# Altium PCB pechatka.PcbDoc
Units mil, origin at the board's own origin, x right, y up, seen from the top; angles counter-clockwise.
Board outline 1140 x 1603 mil, 2 copper layers (Top Layer, Bottom Layer); 26 components, 11 nets, 54 pads, 10 vias.
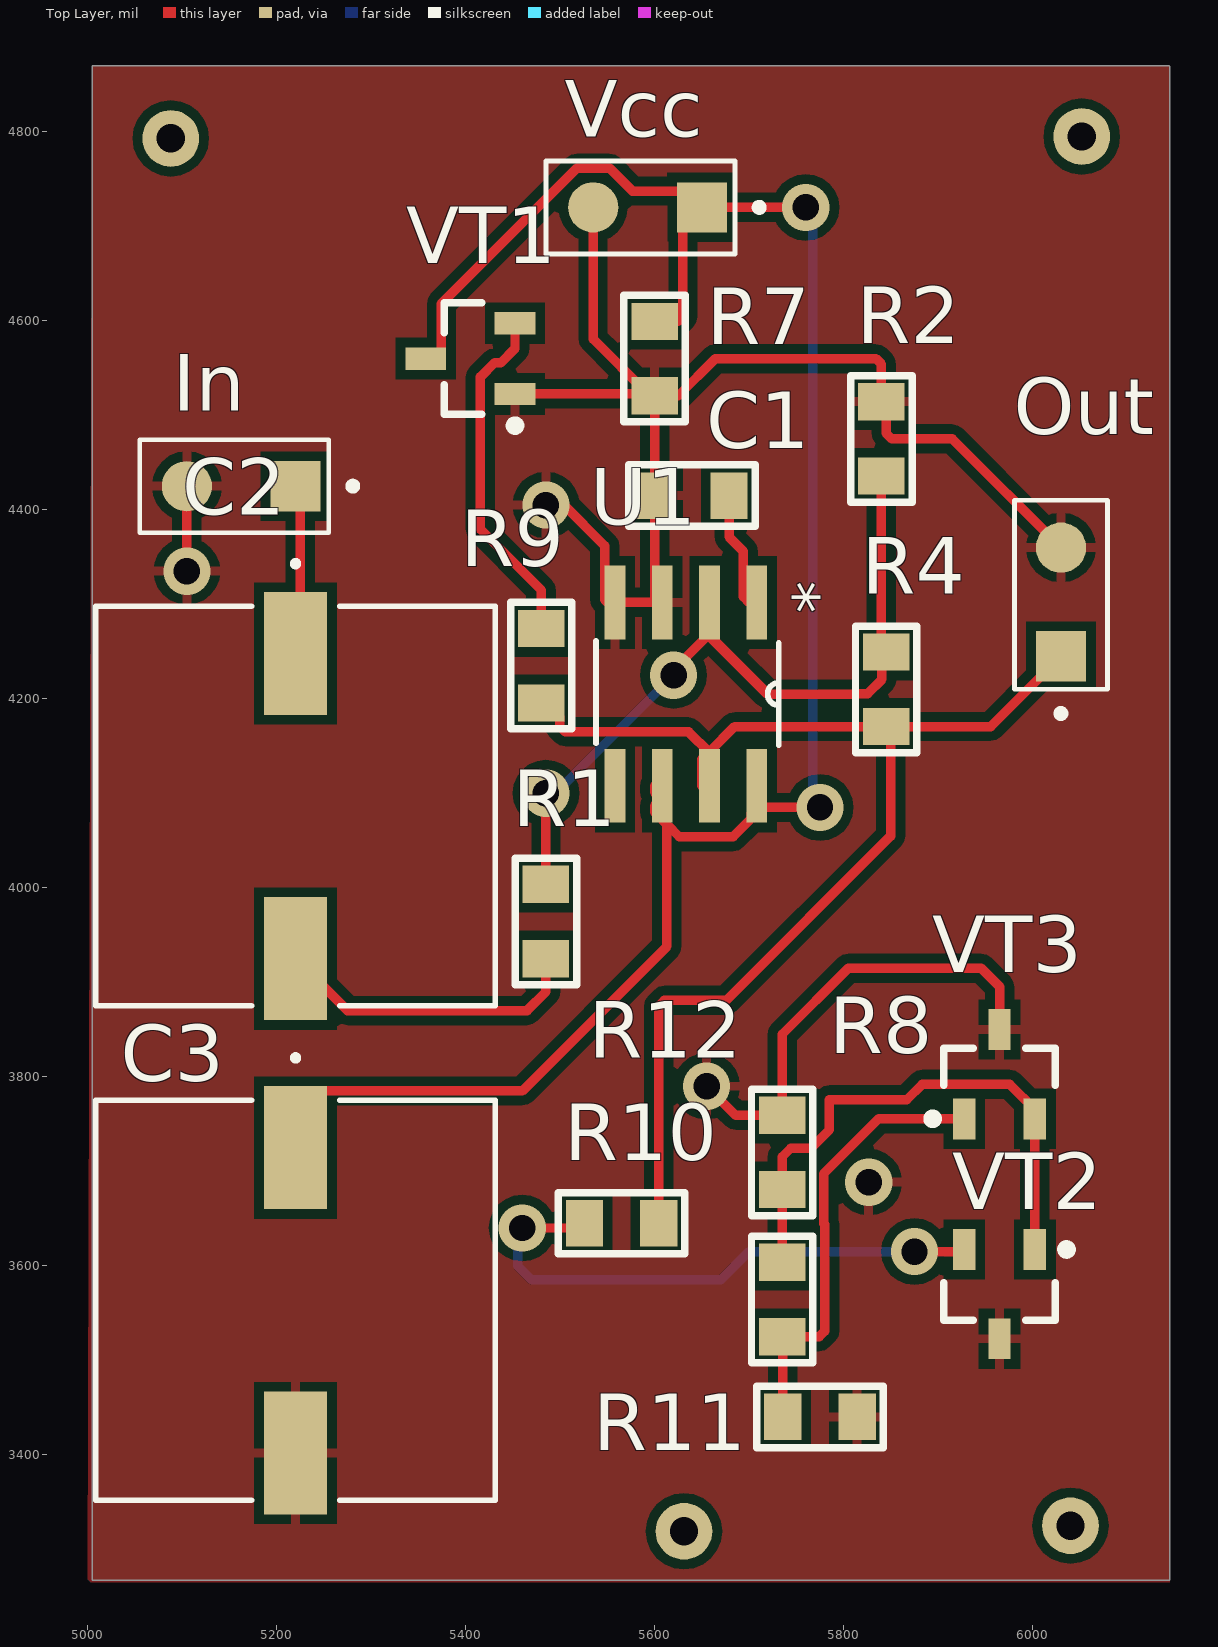
[diagram p0: Top Layer view]
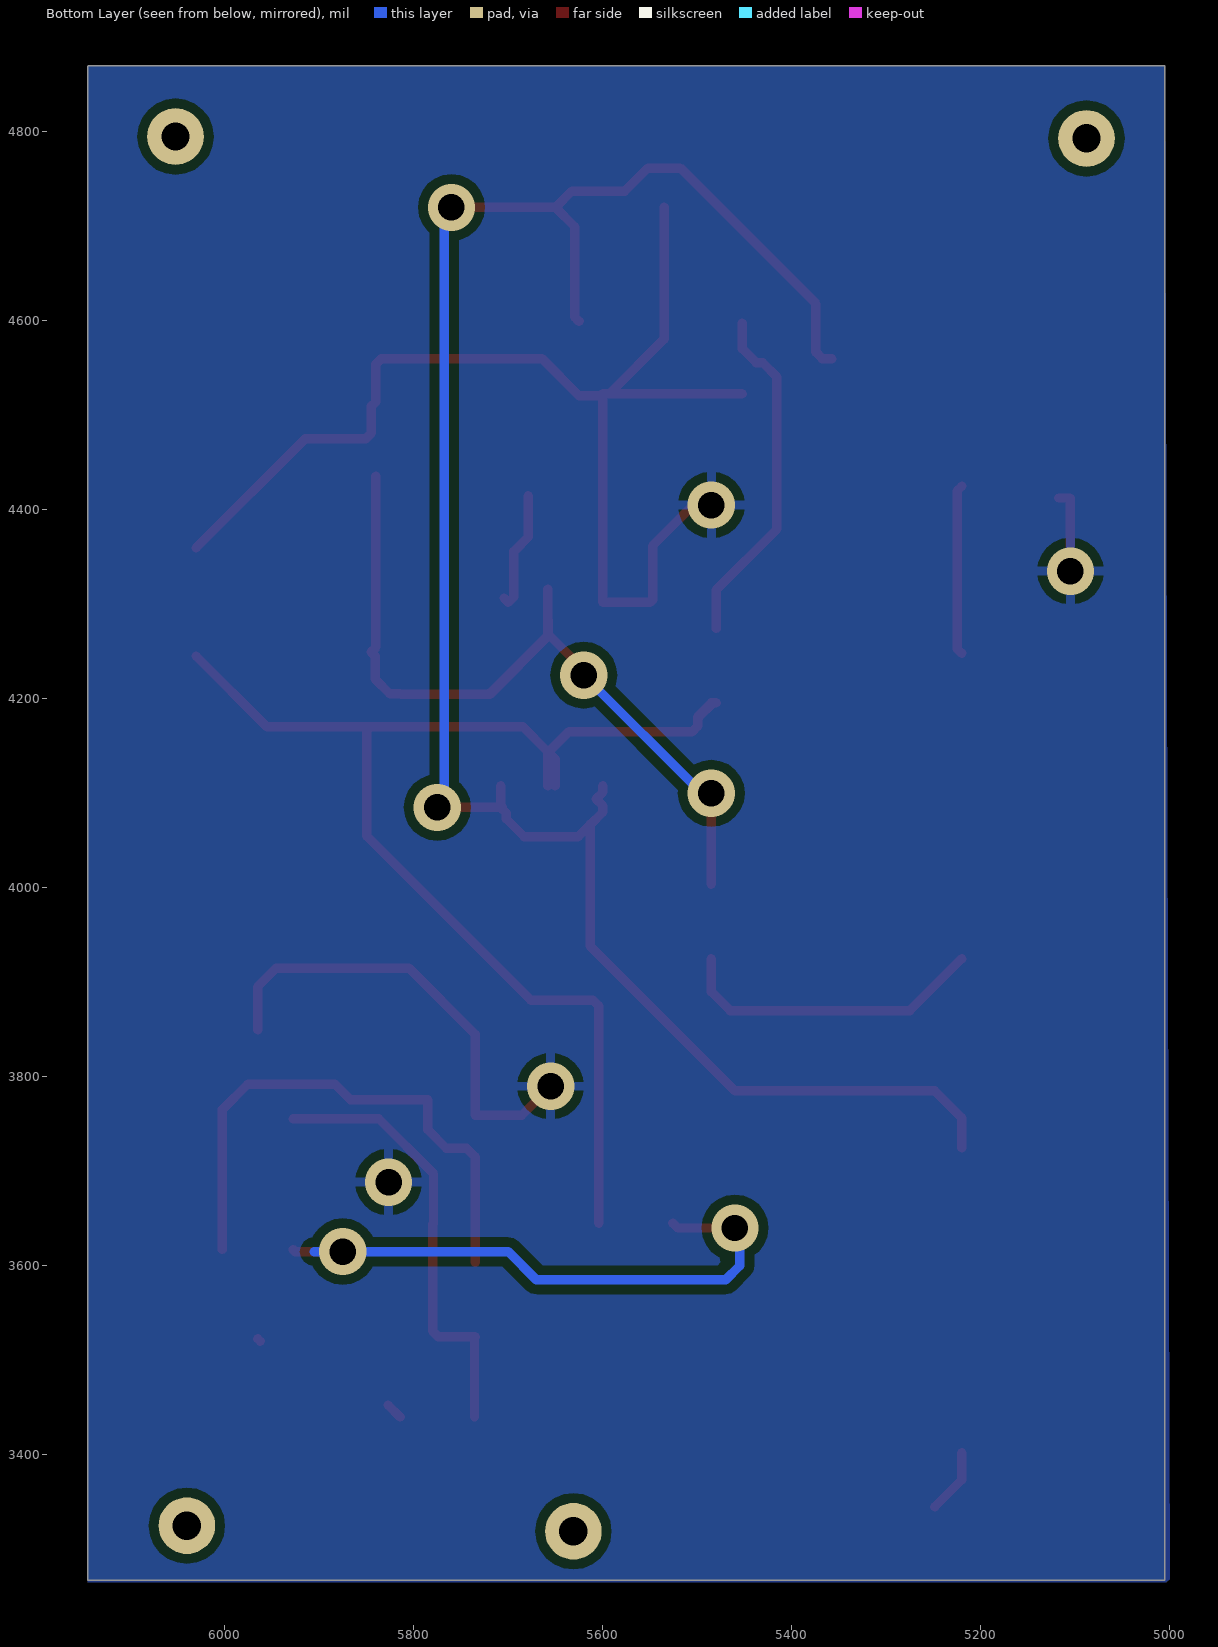
[diagram p1: Bottom Layer view, seen from below]

## Layer stack, top to bottom
Top Solder: solder mask 0.4, Solder Resist, Dk 3.5
Top Layer: signal copper 1.4
Dielectric 1: dielectric 12.6, FR-4, Dk 4.8
Bottom Layer: signal copper 1.4
Bottom Solder: solder mask 0.4, Solder Resist, Dk 3.5

## Board outline
5005,3267 6145,3267 6145,4869 6144,4870 5005,4870

## Design rules (kind name [scope] priority, off if disabled: settings)
Clearance [All] p1: gap=10 ignorepadtopadclearanceinfootprint=FALSE except(0: Arc-Hole Track-Hole SMDPad-Hole THPad-Hole Via-Hole Fill-Hole Poly-Hole Region-Hole Text-Hole)
PolygonConnect [All] p1: connectstyle=Relief reliefconductorwidth=10 reliefentries=4 polygonreliefangle="90 Angle" airgapwidth=10
RoutingVias [All] p1: holewidth=28 width=50 viastyle="Through Hole" minholewidth=28 minwidth=50 maxholewidth=28 maxwidth=50
SolderMaskExpansion [All] p1: expansion=4 istentingtop=FALSE
Width [All] p1: maxlimit=10 minlimit=10 preferedwidth=10
30 further rules are at their usual default settings.

## Classes and differential pairs
component class pricipialka: C1 C2 C3 In Out R1 R2 R4 R7 R8 R9 R10 R11 R12 U1 Vcc VT1 VT2 VT3

## Components (designator, comment, footprint, x,y, rotation, side; value= is the part's Value field where it differs from the comment)
C1 "Ceramic capacitor, 0.1μF, X7R, ±10%, 16V, 0805, -55...+125°C" "CAP: 0805" 5639.37,4415 r180 top value=0.1μF
C2 "Part Number: 35TZV330M10X10.5" CAP_J-V_10X10P00 5220,4086.5 r270 top value=Value
C3 "Part Number: 35TZV330M10X10.5" CAP_J-V_10X10P00 5220,3563.5 r270 top value=Value
In "2х1" "2х1 SMD" 5205,4425 r180 top
Out "2х1" "2х1 SMD" 6030,4260 r90 top
R1 "Resistor film, 10K, ±5%, 0805, 0.125W, -55...+125°C" "RES: 0805" 5485,3964.37 r90 top value=10K
R2 "Resistor film, 15K, ±5%, 0805, 0.125W, -55...+125°C" "RES: 0805" 5840,4475 r270 top value=15K
R4 "Resistor film, 130K, ±5%, 0805, 0.125W, -55...+125°C" "RES: 0805" 5845,4210 r270 top value=130K
R7 "Resistor film, 10K, ±5%, 0805, 0.125W, -55...+125°C" "RES: 0805" 5600,4560 r270 top value=10K
R8 "Resistor film, 15K, ±5%, 0805, 0.125W, -55...+125°C" "RES: 0805" 5735,3720 r270 top value=15K
R9 "Resistor film, 15K, ±5%, 0805, 0.125W, -55...+125°C" "RES: 0805" 5480,4235 r90 top value=15K
R10 "Resistor film, 15K, ±5%, 0805, 0.125W, -55...+125°C" "RES: 0805" 5565,3645 r0 top value=15K
R11 "Resistor film, 15K, ±5%, 0805, 0.125W, -55...+125°C" "RES: 0805" 5775,3440 r0 top value=15K
R12 "Resistor film, 15K, ±5%, 0805, 0.125W, -55...+125°C" "RES: 0805" 5735,3564.37 r270 top value=15K
U1 "LM311DR" D8 5633,4205 r270 top
Vcc "2х1" "2х1 SMD" 5635,4720 r180 top
VT1 "NPN transistor, 45V, 100mA, 100MHz, 300mW, 0.6V, 420, SOT-23, -55...+125°C" SOT23 5405,4560 r180 top
VT2 "PNP transistor, 45V, 100mA, 100MHz, 300mW, 0.65V, 220, SOT-23, -55...+125°C" SOT23 5965,3570 r270 top
VT3 "NPN transistor, 45V, 100mA, 100MHz, 300mW, 0.6V, 420, SOT-23, -55...+125°C" SOT23 5965,3802.76 r90 top
ZBOAS134091851 "Comment" "BOASVIEWdrill:Таблица отверстий:0:0:0:0" 1340,91851 r0 top
ZBOAS277093314 "Comment" "BOASVIEWlayer:Top Layer:2,5:1:1:1" 2770,93314 r0 top (schematic designator fewf)
ZBOAS1856698006 "Comment" "BOASVIEWlayer:Bottom Layer:2,5:-1:32:2" 18566,98006 r0 top (schematic designator fewf)
ZBOAS1947293023 "Comment" "BOASVIEWside:Вид платы слева:2,5:0:0:0" 19472,93023 r0 top
ZBOAS2192091068 "Comment" "BOASVIEWside:Вид платы сверху:2,5:0:0:0" 21920,91068 r0 top
ZBOAS2377994059 "Слой маркировки" "BOASVIEWlayer:Top Overlay:2,5:1:33:2" 23779,94059 r0 top (schematic designator fewf)
ZBOAS3586894775 "Comment" "BOASVIEWassembly:Вид спереди для сборочного:2:1:0:101" 35868,94775 r0 top

## Footprints (in the part's own frame and the unit in brackets; to place one, negate y for a bottom-side part, rotate by r counter-clockwise, add the part's x,y. Pads: shape width x height; smd on the part's side, far side on the other; paste and mask are expansions set on the pad)
"2х1 SMD" [mm]
  rect 1.35x1.35 smd: 1(-0.381,0)
  round 1.35 smd: 2(2.54,0)
  silkscreen extent -2.02,-1.25 3.81,1.25, body extent -5.33,-3.56 7.92,2.85, height 8.76
"BOASVIEWassembly:Вид спереди для сборочного:2:1:0:101" [mil]
"BOASVIEWdrill:Таблица отверстий:0:0:0:0" [mil]
"BOASVIEWlayer:Bottom Layer:2,5:-1:32:2" [mil]
"BOASVIEWlayer:Top Layer:2,5:1:1:1" [mil]
"BOASVIEWlayer:Top Overlay:2,5:1:33:2" [mil]
"BOASVIEWside:Вид платы сверху:2,5:0:0:0" [mil]
"BOASVIEWside:Вид платы слева:2,5:0:0:0" [mil]
"CAP: 0805" [mm]
  rect 1x1.25 smd: 1(-1,0) 2(1,0)
  silkscreen extent -1.7,-0.82 1.7,0.82, body extent -1,-0.62 1,0.63, height 0.78
CAP_J-V_10X10P00 [mil]
  rect 130x67 smd: 1(-161.5,0) 2(161.5,0)
  silkscreen extent -259,-212 212,212, body extent -222,-203 222,203, height 425
D8 [mil]
  rect 78x22 smd: 1(-97,75) 2(-97,25) 3(-97,-25) 4(-97,-75) 5(97,-75) 6(97,-25) 7(97,25) 8(97,75)
  silkscreen extent -56,-95 54,99, body extent -118,-96 118,96, height 69
"RES: 0805" [mm]
  rect 1x1.25 smd: 1(-1,0) 2(1,0)
  silkscreen extent -1.7,-0.82 1.7,0.82, body extent -1,-0.6 1,0.6, height 0.44
SOT23 [mm]
  rect 1.1x0.6 smd: 1(-1.2,0.95) 2(-1.2,-0.95) 3(1.2,0)
  round 0.5 on Mech1: ""(-0.9,1.1)
  silkscreen extent -1.33,-1.5 0.7,1.92, body extent -1.32,-1.52 1.32,1.52, height 1.12

## Part data
C1: library part Ceramic_0805, Manufacturer=Yageo, Package=0805, PartNumber=CC0805KRX7R7BB104, Temperature=-55...+125°C, Tolerance=±10%, TypeCapacitor="Ceramic capacitor", TypeDielectric=X7R, Voltage=16V, HelpURL=https://www.digikey.com/product-detail/en/yageo/CC0805KRX7R7BB104/311-1142-1-ND/303052, ValueManufacturerPartNumber="Ceramic capacitor, 0.1μF, X7R, ±10%, 16V, 0805, -55...+125°C"
C2 C3: library part 35TZV330M10X10.5, "No Description Available", Built_By=EMA_Cory, Copyright="Copyright (C) 2018 Accelerated Designs. All rights reserved", Manufacturer_Part_Number=35TZV330M10X10.5, RefDes=RefDes, Type=DEV, Vendor="Rubycon Netherlands"
In Out Vcc: "Board-To-Board Connector, Straight, AMPMODU Mod II Series, Through Hole, Header, 2, 2.54 mm", Package=None, Availability=Unavailable, Centerline_Pitch="2.54 mm[.1 in]", EU_RoHS_Compliance=Compliant, MF="TE Connectivity", MP=826926-2, Number_of_Positions=2, Price=None, Product_Type=Connector, SnapEDA_Link=https://www.snapeda.com/parts/826926-2/TE%20Connectivity%20AMP%20Connectors/view-part/554683/?ref=snap, TE_purchase_URL=https://www.te.com/usa-en/product-826926-2.html?te_bu=Cor&te_type=disp&te_campaign=seda_glo_cor-seda-global-disp-prtnr-fy19-seda-model-bom-cta_sma-317_1&elqCampaignId=32493
R1 R2 R4 R7 R8 R9 R10 R11 R12: library part Resistor_0805, Manufacturer=Yageo, Package=0805, PartNumber=RC0805JR-07100RL, Power=0.125W, Temperature=-55...+125°C, Tolerance=±5%, TypeResistor="Resistor film", HelpURL=https://www.digikey.com/product-detail/en/yageo/RC0805JR-07100RL/311-100ARCT-ND/731185
  R1 R7: ValueManufacturerPartNumber="Resistor film, 10K, ±5%, 0805, 0.125W, -55...+125°C"
  R2 R8 R9 R10 R11 R12: ValueManufacturerPartNumber="Resistor film, 15K, ±5%, 0805, 0.125W, -55...+125°C"
  R4: ValueManufacturerPartNumber="Resistor film, 130K, ±5%, 0805, 0.125W, -55...+125°C"
U1: "Differential Comparator With Strobes", Manufacturer="Texas Instruments", PACKAGE_DESIGNATOR=D, Copyright="Copyright (C) 2018 Accelerated Designs. All rights reserved", Datasheet_URL=http://www.ti.com/lit/gpn/LM311, FAMILY_NAME=COMPARATOR, GENERIC_PART_NUMBER=LM311, INDUSTRY_STD_PKG_TYPE=SOIC, PIN_COUNT=8, RefDes=RefDes, Type=DEV
VT1 VT3: library part BJT_NPN_132, CurrentCE=100mA, CurrentGain=420, Frequency=100MHz, Manufacturer="ON Semiconductor", MaxPower=300mW, Package=SOT-23, PartNumber=BC847CLT1G, Temperature=-55...+125°C, VoltageCE=45V, VoltageSaturation=0.6V, HelpURL=https://www.digikey.com/product-detail/en/on-semiconductor/BC847CLT1G/BC847CLT1GOSCT-ND/917836, TypeTransistor="NPN transistor", ValueManufacturerPartNumber="NPN transistor, 45V, 100mA, 100MHz, 300mW, 0.6V, 420, SOT-23, -55...+125°C"
VT2: library part BJT_PNP_123, CurrentCE=100mA, CurrentGain=220, Frequency=100MHz, Manufacturer="ON Semiconductor", MaxPower=300mW, Package=SOT-23, PartNumber=BC857BLT3G, Temperature=-55...+125°C, VoltageCE=45V, VoltageSaturation=0.65V, HelpURL=https://www.digikey.com/product-detail/en/on-semiconductor/BC857BLT3G/BC857BLT3GOSCT-ND/2704963, TypeTransistor="PNP transistor", ValueManufacturerPartNumber="PNP transistor, 45V, 100mA, 100MHz, 300mW, 0.65V, 220, SOT-23, -55...+125°C"

## Free pads (board coordinates)
  round 60 hole 30: 5(6052,4795) 6(5088,4793) 7(6040,3325) 8(5631,3319)

## Via types
v1: diameter 50, hole 28, Top Layer to Bottom Layer, 10 vias

## Nets (pads, with @x,y where several pads share a name; then routed paths per layer and width w, separated by ;. In a path a pad name is that pad's centre, name@x,y a point inside that pad or via, vN(x,y) a via of type N, cw(c..) or ccw(c..) an arc to the next point about the centre after c; other vN are vias at no path point)
GND: C1.2 C3.2 In.2 Out.2 R2.1 R7.2 R8.1 R11.2 U1.3 U1.4 Vcc.2 VT1.1 VT2.3 VT3.3 | length 2026.9
  Top Layer w10: v1(5105,4335) 5105,4411.97 5105.53,4412.5 In.2@5117.5,4412.5 ; C3.2 5220,3373.5 C3.2@5248.5,3345 ; VT1.1 R7.2@5593.11,4522.6 ; v1(5485,4405) 5504.07,4405 5547.1,4361.97 5547.1,4304.9 5550,4302 5600,4302 C1.2 R7.2 5625,4520.63 5664.37,4560 5834.14,4560 5840,4554.14 R2.1 5845,4509.37 5845,4480.86 5850.86,4475 5915,4475 Out.2 ; Vcc.2 5535,4580.71 R7.2@5593.11,4522.6 ; R7.2@5600,4522.6 R7.2@5593.11,4522.6 ; v1@5662.65,3797.65 5658.83,3793.83 5658.83,3786.17 5685.63,3759.37 R8.1 5735,3845 5805,3915 5945.51,3915 5965,3895.51 VT3.3 ; R11.2 R11.2@5826.87,3452.5 ; v1(5826.52,3688.48) v1@5826.87,3688.13 ; VT2.3@5962.44,3520.19 VT2.3
  other v1: 5655,3790
NetC1_1: C1.1 U1.1 | length 128
  Top Layer w10: C1.1 5678.74,4371.26 5694,4356 5694,4308 5700,4302 U1.1@5704.37,4306.37
NetC2_1: C2.1 In.1 | length 181.1
  Top Layer w10: C2.1 5225,4253 5225,4420 In.1
NetC2_2: C2.2 R1.1 | length 331.1
  Top Layer w10: C2.2 5275,3870 5465,3870 5485,3890 R1.1
NetC3_1: C3.1 R7.1 U1.6 U1.8 Vcc.1 VT1.3 | length 2194.9
  Top Layer w10: C3.1 5220,3756.5 5248.5,3785 5460,3785 5613,3938 5613,4067 ; VT1.3 5367.6,4560 5374.41,4566.81 5374.41,4618.21 5517.78,4761.57 5552.22,4761.57 5576.57,4737.22 5632.78,4737.22 Vcc.1 ; U1.6@5600,4108 5600,4101 5607,4094 5600,4087 5600,4080 5613,4067 ; 5625,4599.37 5629.61,4603.98 5629.61,4699.61 Vcc.1 ; U1.8@5706,4085 U1.8@5708,4085 ; U1.8 U1.8@5708,4085 ; v1(5760,4720) Vcc.1 ; v1(5775,4085) U1.8@5708,4085 ; 5613,4067 5626,4054 5683,4054 5702,4073 5702,4079 U1.8@5708,4085
  Bottom Layer w10: v1(5760,4720) 5767.5,4712.5 5767.5,4092.5 v1(5775,4085)
NetOut_1: Out.1 R4.2 R9.1 R10.2 U1.7 | length 1385.4
  Top Layer w10: R9.1@5497.73,4180.94 5483.05,4195.63 R9.1 5484.92,4195.63 5499.61,4180.94 5499.61,4170.86 5505.46,4165 5636,4165 5658,4143 U1.7 ; R10.2 5604.37,3875.15 5610.23,3881.01 5676.01,3881.01 5849.69,4054.69 5849.69,4165.94 R4.2 ; U1.7@5650,4108 5650,4136 5657.5,4143.5 5684.63,4170.63 R4.2 ; Out.1 5955.63,4170.63 5849.69,4170.63 R4.2
NetR1_2: R1.2 R2.2 R4.1 U1.2 | length 961.2
  Top Layer w10: R1.2 v1(5485,4100) ; v1(5620,4225) 5620,4230.78 5657.05,4267.83 5657.51,4267.4 5657.86,4302 5658,4316.11 U1.2 5658,4267 5718.81,4206.19 5720,4205 ; U1.2@5657.5,4266.5 5718.31,4205.69 ccw(c5720,4207.41) 5720,4205 ; R2.2 5840,4254.37 R4.1 5840.54,4244.91 5840.54,4220.54 5825.31,4205.31 5814.18,4205.31 5813.87,4205 5720,4205
  Bottom Layer w10: v1(5485,4100) 5495,4100 v1(5620,4225)
NetR8_2: R8.2 R12.1 VT2.1 VT3.2 | length 588.6
  Top Layer w10: R12.1 R8.2 5735,3715.32 5744.08,3724.39 5765.53,3724.39 5785,3743.87 5785,3775.63 5866.85,3775.63 5883.38,3792.17 5975.59,3792.17 6002.4,3765.35 VT3.2 VT2.1
NetR9_2: R9.2 VT1.2 | length 368.8
  Top Layer w10: VT1.2 5452.24,4570.59 5437.26,4555.61 5430.57,4555.61 5415.59,4540.62 5415.59,4379.41 5480,4315 R9.2
NetR10_1: R10.1 VT2.2 | length 631.9
  Top Layer w10: v1(5460,3640) 5520.63,3640 R10.1 ; v1(5875,3615) 5925.35,3615 VT2.2
  Bottom Layer w10: v1(5460,3640) 5455,3635 5455,3600 5470,3585 5670,3585 5700,3615 5905,3615
NetR11_1: R11.1 R12.2 VT3.1 | length 472.4
  Top Layer w10: R11.1 5735.63,3524.37 R12.2 5774.14,3525 5780,3530.86 5780,3643.75 5779.02,3644.73 5779.02,3697.56 5836.98,3755.51 VT3.1
pads on no net: U1.5 VT1. VT2. VT3.

## Polygon pours and split planes (outlines as drawn)
GND on Top Layer "GND_L01_P002" (solid, pour order 2): 5004.95,4870 6145,4870 6145,3265 4999.98,3265
no net on Top Layer "NONET_L01_P000" (solid, pour order 0): 4985,4930
GND on Bottom Layer "GND_L02_P001" (solid, pour order 1): 5004.95,4870 6145,4870 6145,3265 4999.98,3265

## Silkscreen, mask and mechanical layers (free items; w line width, h text height)
Board:
  text "BOASFORMAT|А3|1|0|883070867|165354330|1000000000|2,5:1|" at 0,100000 h0
  text "BOASFORMAT|А3|2|165354330|883070867|330708660|1000000000|2,5:1|" at 16535.43,100000 h0
  text "BOASFORMAT|А4|101|330708660|883070867|413385825|1000000000|2,5:1|" at 33070.87,100000 h0
  text "DimD|45635001|982330001|-8864999|-6699999|375000|2,5|4 отв.|||js12|False|False|False|False" at 5450,98903 h0
  text "DimPos|365380000|978080000|7820000|-10320000|4|1178539" at 35756,98840 h0
  text "DimPos|371780000|977020000|-15740000|-10040000|1|908151" at 38752,98706 h0
  text "DimPos|371710000|977270000|4150000|-8710000|3|1537097" at 36756,98598 h0
  text "DimPos|377140000|978040000|-4200000|-7120000|2|1772217" at 38134,98516 h0
  text "DimV|-10000|-40120000|24380000|984190000|-11750000|-37180000|2,5||||js12|False|False|False|False" at 2438,98419 h0
  text "DimPos|378790000|971690000|-10890000|-9730000|10|2286542" at 38968,98142 h0
  text "DimPos|379870000|974080000|-10760000|-6400000|3|1537097" at 39063,98048 h0
  text "DimPos|379180000|969700000|-8760000|-7880000|1|908151" at 38794,97758 h0
  text "DimPos|379430000|969820000|-13870000|-5150000|2|1772217" at 39330,97497 h0
  text "DimPos|367850000|969780000|10990000|-5170000|11|1904472" at 35686,97495 h0
  text "DimH|-28490000|0|56220000|973180000|-15960000|8070000|2,5||||js12|False|False|False|False" at 5622,97318 h0
  text "DimMark|54170000|966090000|-13410000|-3850000|1||||0" at 6758,96994 h0
  text "DimV|40000|-490000|276270000|967190000|5620000|-530000|2,5||||js12|False|False|False|False" at 27627,96719 h0
  text "DimPos|360960000|962170000|7420000|-4660000|4|1178539" at 35354,96683 h0
  text "DimPos|360850000|961640000|0|0|5|1742827" at 36085,96164 h0
  text "DimPos|379750000|951270000|-7520000|-6500000|5|1742827" at 38727,95777 h0
  text "DimPos|361730000|950910000|9270000|-6040000|6|1454805" at 35246,95695 h0
  text "SET2|Superlayer=MechanicalLayer7|Wsuperlayer=MechanicalLayer8|Layergrid=MechanicalLayer9|Werase=MechanicalLayer11|Layermark=MechanicalLayer12|Layerstamp=MechanicalLayer13|Thinline=0,18|Basicline=0,6|Gridline=0,18|Boardline=0,6|Contourpolygonline=0,6|PcbGridStep=1,25|PcbGridCleareanceAtView=0|PcbGridNumberEach=l4|PcbGridLineEach=l2|PcbGridCountSecondaryStrip=1|PcbGridEnabledStrip=True|PcbSignalGridEnabled=True|PcbSignalShowBukva=True|RealSignalLayerNames=False|PcbGridEnabledBothSide=False|RealLayerNames=False|SilkShowPad=True|SilkViewName=Слой маркировки|SilkShowHole=True|SilkShowAxis=True|SilkShowBukva=True|SilkShowGrid=False|SolderShowGrid=False|SolderViewName=Слой маски|SolderShowAxis=False|SolderShowBukva=False|MainViewShowGrid=False|MainViewUseShapesDrill=False|ShowBukvaOnSboky=True|Density=2,2|TableName=Таблица 1|RazrezWidth=100|Sher=Rz 160|Asstoplayer=MechanicalLayer1|Asstoplayer2=None|Assbottomlayer=MechanicalLayer2|Assbottomlayer2=None|AssMinDiameterHoles=2|AssDim=True|AssMech=False|AssSilk=False|AssComponentSilk=False|AssFreeSilk=False|AssSmdPads=False|AssGridEnable=False|Mirror=Horisontal|PcbGridFontSize=5|PcbGridCenterZero=False|TTStampDistance=12|MainFontSize=5|PolyStep=4|PcbDrillDrawingGridEnabled=False|PcbDrillDrawingViewName=Слой сверловки|PcbDrillDrawingShowBukva=False|PcbDrillDrawingShowAxis=False|PcbSignalLayersUseDrill=False|PcbSignalLayersUseShapesDrill=False|PcbSignalLayersShowAxis=False" at 0,1 h0
  text "2TT0007#  8 Клеймить." at 0,0 h0
  text "2TT0006#  7 Маркировать обозначение и заводской номер печатного узла черной краской МКЭ ОСТ 4ГО.054.2050М2 шрифтом 3,5 или 5 тип А ГОСТ 2.304-81, вместе, удобном для чтения." at 0,0 h0
  text "2TT0005#  6 Покрытие лак УР-231 ТУ6-21-14-90(3). Допускается покрытие лаком ЭП-730 ГОСТ 20824-81(3)." at 0,0 h0
  text "2TT0004#  5 Элементы поверхностного монтажа паять припойной пастой ПОС-61 ЛОК ТУ 400 К''Р''-1805-22-91, флюс ФПС-3 ТУ400 СП \"ЭВ\"-2178-137-98." at 0,0 h0
  text "2TT0003#  4 Меры защиты от статического электричества по ОСТ 92-1615-74. Степень жесткости II по ОСТ11.073.062-2001." at 0,0 h0
  text "2TT0002#  3** Размеры обеспеч. инстр." at 0,0 h0
  text "2TT0001#  2* Размеры для справок." at 0,0 h0
  text "2TT0000#  1 Установку элементов производить по чертежу." at 0,0 h0
  text "2STAMP|Разработал|Гончаренко В.Ю." at 0,0 h0
  text "2STAMP|Проверил|Смолин В.С." at 0,0 h0
  text "2STAMP|Техконтроль|Рассказа Д.С." at 0,0 h0
  text "2STAMP|Var|Нач. отд." at 0,0 h0
  text "2STAMP|Tech|Т.контр." at 0,0 h0
  text "2STAMP|Normo|Н.контр." at 0,0 h0
  text "2STAMP|Check|Пров." at 0,0 h0
  text "2STAMP|Design|Разраб." at 0,0 h0
  text "2STAMP|Utv|Утв." at 0,0 h0
  text "2STAMP|Обозначение|CФ МЭИ ПЭ2-18 3 11.03.04 СБ" at 0,0 h0
  text "2STAMP|Организация|Филиал НИУ \"МЭИ\" в г.Смоленск ПЭ2-18" at 0,0 h0
  text "2STAMP|ТипДокумента|Сборочный чертёж" at 0,0 h0
  text "2STAMP|Наименование2|Усилитель звука на дискретных элементах" at 0,0 h0
  text "STAMP|Обозначение|CФ МЭИ ПЭ2-18 3 11.03.04" at 0,0 h0
  text "STAMP|Организация|Филиал НИУ \"МЭИ\" в г.Смоленск ПЭ2-18" at 0,0 h0
  text "STAMP|Наименование2|Плата печатная" at 0,0 h0
  text "STAMP|Материал1|FR-4" at 0,0 h0
  text "STAMP|Разработал|Гончаренко В.Ю." at 0,0 h0
  text "STAMP|Проверил|Смолин В.С." at 0,0 h0
  text "STAMP|Техконтроль|Рассказа Д.С." at 0,0 h0
  text "STAMP|Var|Нач. отд." at 0,0 h0
  text "STAMP|Normo|Н.контр." at 0,0 h0
  text "STAMP|Utv|Утв." at 0,0 h0
  text "STAMP|Tech|Т.контр." at 0,0 h0
  text "STAMP|Check|Пров." at 0,0 h0
  text "STAMP|Design|Разраб." at 0,0 h0
  text "TT0016#  17 Маркировать месяц и год изготовления черной краской МКЭ ОСТ4 ГО.054.205 ОМ2 по инструкции И-75-89 шрифтом 3,5 или 5 тип А ГОСТ 2.304-81." at 0,0 h0
  text "TT0015#  16 Покрытие контактных площадок и металлизированных отверстий Хим. Мм Гор. ПОС-63, ГОСТ 21930-76." at 0,0 h0
  text "TT0014#  15 Маркировать защитной маской PMR-6000 W30/CA-40 G30, цвет белый, фирма «TAIYO INK». Попадание маркировочной краски на паяемые поверхности не допускается. Допускаются разрывы в маркировочных знаках, не искажающие восприятие информации." at 0,0 h0
  text "TT0013#  14 Покрытие печатной платы защитной паяльной маской TAIYO PSR-4000 H855/CA-40 H855 фирма «TAIYO INK»  с двух сторон, кроме контактных площадок. Допускается отсутствие покрытия вокруг контактных площадок, включая проводники и полигоны, на размере не более 0,5 мм от края контактной площадки. Допускается отсутствие покрытия по контуру платы и вокруг неметаллизированных отверстий на размере не более 1,1 мм." at 0,0 h0
  text "TT0012#  13 Покрытие проводящего рисунка платы Хим. Мм." at 0,0 h0
  text "TT0011#  12 Допускается полное или частичное заполнение припоем переходных отверстий, их диаметры контролю не подлежат." at 0,0 h0
  text "TT0010#  11 Предельные отклонения расстояний между центрами отверстий ±0,2 мм, кроме оговоренных особо." at 0,0 h0
  text "TT0009#  10 Форма контактной площадки произвольная. Допускается занижение контактных площадок до 0,05 мм от края отверстия." at 0,0 h0
  text "TT0008#  9 Расстояние между печатными проводниками и контактными площадками не менее 0,2 мм." at 0,0 h0
  text "TT0007#  8 Ширина печатных проводников не менее (0,25±0,05) мм." at 0,0 h0
  text "TT0006#  7 Места, обведенные штрихпунктирной линией, печатными проводниками и контактными площадками не занимать." at 0,0 h0
  text "TT0005#  6 Конфигурацию печатных проводников выдерживать по координатной сетке с отклонениями от чертежа ±1,5 мм." at 0,0 h0
  text "TT0004#  5 Шаг координатной сетки 1,25 мм. Линии сетки нанесены через одну." at 0,0 h0
  text "TT0003#  4 Печатная плата должна соответствовать ГОСТ Р 53429-2009, группе жесткости 3 при верхнем значении температуры окружающей среды (85±2) °С." at 0,0 h0
  text "TT0002#  3 Класс точности 3 по ГОСТ Р 53429-2009." at 0,0 h0
  text "TT0001#  2 ** Размер обеспеч. инстр." at 0,0 h0
  text "TT0000#  1 *  Размер для справок." at 0,0 h0
  text "BOASVIADRILLTABLE:none,280000,10," at 0,0 h0
  text "2BOASDRILLTABLE:none,300000,Да,4,True," at 0,0 h0
Mechanical 8:
  region: 25327.64,91062.36 25353.11,90995.73 25372.44,90849.49 25327.78,90849.47 25327.74,90886.15 25349.92,90869.15 25324.13,91062.35
  region: 25327.64,91118.64 25353.11,91185.27 25372.44,91331.51 25327.78,91331.53 25327.74,91294.85 25349.92,91311.85 25324.13,91118.65
  region: 25320.36,91062.36 25294.89,90995.73 25275.56,90849.49 25320.22,90849.47 25320.26,90886.15 25298.08,90869.15 25323.87,91062.35
  region: 25320.36,91118.64 25294.89,91185.27 25275.56,91331.51 25320.22,91331.53 25320.26,91294.85 25298.08,91311.85 25323.87,91118.65
  region: 5618.36,98128.64 5551.73,98154.11 5405.49,98173.44 5405.47,98128.78 5442.15,98128.74 5425.15,98150.92 5618.35,98125.13
  region: 5618.36,98121.36 5551.73,98095.89 5405.49,98076.56 5405.47,98121.22 5442.15,98121.26 5425.15,98099.08 5618.35,98124.87
  region: 2776.64,98121.36 2843.27,98095.89 2989.51,98076.56 2989.53,98121.22 2952.85,98121.26 2969.85,98099.08 2776.65,98124.87
  region: 2776.64,98128.64 2843.27,98154.11 2989.51,98173.44 2989.53,98128.78 2952.85,98128.74 2969.85,98150.92 2776.65,98125.13
  region: 5352.49,97112.1 5283.98,97092.24 5155.65,97019.48 5182.56,96983.85 5211.85,97005.93 5184.91,97013.37 5354.6,97109.29
  region: 5356.87,97106.29 5319.07,97045.8 5214.06,96942.2 5187.12,96977.82 5216.35,96999.97 5216.17,96972.02 5354.75,97109.09
  region: 5422.51,97155.9 5491.02,97175.76 5619.35,97248.52 5592.44,97284.15 5563.15,97262.07 5590.09,97254.63 5420.4,97158.71
  region: 5418.13,97161.71 5455.93,97222.2 5560.94,97325.8 5587.88,97290.18 5558.65,97268.03 5558.83,97295.98 5420.25,97158.91
  region: 2090.64,97316.36 2116.11,97249.73 2135.44,97103.49 2090.78,97103.47 2090.74,97140.15 2112.92,97123.15 2087.13,97316.35
  region: 2090.64,93311.64 2116.11,93378.27 2135.44,93524.51 2090.78,93524.53 2090.74,93487.85 2112.92,93504.85 2087.13,93311.65
  region: 2083.36,97316.36 2057.89,97249.73 2038.56,97103.49 2083.22,97103.47 2083.26,97140.15 2061.08,97123.15 2086.87,97316.35
  region: 2083.36,93311.64 2057.89,93378.27 2038.56,93524.51 2083.22,93524.53 2083.26,93487.85 2061.08,93504.85 2086.87,93311.65
Mechanical 9:
  circle w23.62: c36173,95091 r7.87
  circle w23.62: c37975,95127 r7.87
  circle w23.62: c36096,96217 r7.87
  circle w23.62: c37171,97727 r7.87
  circle w23.62: c37714,97804 r7.87
  circle w23.62: c37918,96970 r7.87
  circle w23.62: c5417,96609 r7.87
  region: 25324,91066 25349.92,90869.15 25324,90888.83 25298.08,90869.15
  region: 25324,91115 25298.08,91311.85 25324,91292.17 25349.92,91311.85
  region: 5622,98125 5425.15,98099.08 5444.83,98125 5425.15,98150.92
  region: 2773,98125 2969.85,98150.92 2950.17,98125 2969.85,98099.08
  region: 5357.58,97111.39 5216.17,96972.02 5216.24,97004.57 5184.91,97013.37
  region: 5417.42,97156.61 5558.83,97295.98 5558.76,97263.43 5590.09,97254.63
  region: 2087,97320 2112.92,97123.15 2087,97142.83 2061.08,97123.15
  region: 2087,93308 2061.08,93504.85 2087,93485.17 2112.92,93504.85
  lines w7.09: 2047.63,93308 3262,93308 ; 2047.63,97320 3261,97320 ; 2087,93308 2087,97320 ; 2773,97318 2773,98164.37 ; 2773,98125 5622,98125 ; 5137.72,96945.22 6274,97804 7725.36,97804 ; 5622,97318 5622,98164.37 ; 24762,91066 25363.37,91066 ; 24766,91115 25363.37,91115 ; 25324,90413.91 25324,91429.96 ; 34903.67,95695 35246,95695 36173,95091 ; 35039.3,96683 35354,96683 36096,96217 ; 36405.44,98598 36756,98598 37171,97727 ; 37714,97804 38134,98516 38508.07,98516 ; 37918,96970 38794,97758 39081.67,97758 ; 37975,95127 38727,95777 39098.13,95777
  lines w13.78: 7031.65,97913.84 7154.48,98098.09 ; 7041.5,97982.85 ccw(c7071.02,97985.1) 7072.19,97955.52 ; 7041.74,97983.13 cw(c7111.18,97985.89) 7119.96,98054.82 cw(c7114.72,98025.65) 7144.11,98029.25 ; 7072.59,97955.47 ccw(c7075.35,98024.47) 7144.26,98028.95
  text "3" at 36503.87,98697.61 h423.23
  text "2" at 38232.43,98615.61 h423.23
  text "28,95" at 3957.27,98224.61 h302.38
  text "4 отв." at 6457.46,97903.61 h302.38
  text "0,76" at 7014.72,97903.61 h302.38
  text "1" at 38892.43,97857.61 h423.23
  text "4" at 35137.72,96782.61 h423.23
  text "5" at 38825.43,95876.61 h423.23
  text "6" at 35002.09,95794.61 h423.23
  text "40,76" at 1987.39,95085.63 h302.38 r90
  text "0,5" at 25224.39,90576.12 h302.38 r90
Mechanical 13:
  lines w7.09: 9055.12,88700.79 11614.17,88700.79 ; 9055.12,88897.64 11614.17,88897.64 ; 9055.12,89094.49 11614.17,89094.49 ; 9055.12,89291.34 11614.17,89291.34 ; 9055.12,89488.19 11614.17,89488.19 ; 9055.12,90078.74 11614.17,90078.74 ; 9055.12,90275.59 11614.17,90275.59 ; 9055.12,90472.44 11614.17,90472.44 ; 14565.35,89291.34 14565.35,89881.89 ; 14762.99,89291.34 14762.99,89881.89 ; 15421.26,99295.28 15543.31,99082.68 15763.78,99468.5 ; 25590.55,88897.64 28149.61,88897.64 ; 33858.27,88700.79 36417.32,88700.79 ; 33858.27,88897.64 36417.32,88897.64 ; 33858.27,89094.49 36417.32,89094.49 ; 33858.27,89291.34 36417.32,89291.34 ; 33858.27,89488.19 36417.32,89488.19 ; 33858.27,90078.74 36417.32,90078.74 ; 33858.27,90275.59 36417.32,90275.59 ; 33858.27,90472.44 36417.32,90472.44 ; 39368.5,89291.34 39368.5,89881.89 ; 39566.14,89291.34 39566.14,89881.89
  lines w23.62: 314.96,89488.19 787.4,89488.19 ; 314.96,90866.14 787.4,90866.14 ; 314.96,91850.39 787.4,91850.39 ; 314.96,92834.65 787.4,92834.65 ; 314.96,97440.94 787.4,97440.94 ; 511.81,88503.94 511.81,94212.6 ; 511.81,95078.74 511.81,99803.15 ; 787.4,94212.6 314.96,94212.6 314.96,88503.94 787.4,88503.94 ; 787.4,95078.74 314.96,95078.74 314.96,99803.15 787.4,99803.15 ; 787.4,99251.97 3543.31,99251.97 3543.31,99803.15 ; 9055.12,88503.94 9055.12,90669.29 16338.58,90669.29 ; 9055.12,89685.04 11614.17,89685.04 ; 9055.12,89881.89 11614.17,89881.89 ; 9330.71,89685.04 9330.71,90669.29 ; 9724.41,88503.94 9724.41,90669.29 ; 10629.92,88503.94 10629.92,90669.29 ; 11220.47,88503.94 11220.47,90669.29 ; 11614.17,88503.94 11614.17,90669.29 16338.58,90669.29 ; 11614.17,89094.49 14370.08,89094.49 16338.58,89094.49 ; 11614.17,90078.74 16338.58,90078.74 ; 13543.31,99370.08 13740.16,99015.75 14039.37,99566.93 ; 14043.31,99566.93 16023.62,99566.93 ; 14370.08,88503.94 14370.08,90078.74 ; 14370.08,89291.34 16338.58,89291.34 ; 14370.08,89881.89 14960.63,89881.89 16338.58,89881.89 ; 14960.63,89291.34 14960.63,90078.74 ; 15179.92,89094.49 15179.92,89291.34 ; 15629.92,89291.34 15629.92,90078.74 ; 16338.58,90984.25 16338.58,90669.29 ; 16850.39,89488.19 17322.83,89488.19 ; 16850.39,90866.14 17322.83,90866.14 ; 16850.39,91850.39 17322.83,91850.39 ; 16850.39,92834.65 17322.83,92834.65 ; 17047.24,88503.94 17047.24,94212.6 ; 17322.83,94212.6 16850.39,94212.6 16850.39,88503.94 17322.83,88503.94 ; 17322.83,99251.97 20078.74,99251.97 20078.74,99803.15 ; 25590.55,88503.94 25590.55,89094.49 32874.02,89094.49 ; 25590.55,88700.79 25866.14,88700.79 26259.84,88700.79 27165.35,88700.79 27755.91,88700.79 28149.61,88700.79 ; 25866.14,88503.94 25866.14,89094.49 ; 26259.84,88503.94 26259.84,89094.49 ; 27165.35,88503.94 27165.35,89094.49 ; 27755.91,88503.94 27755.91,89094.49 ; 28149.61,88503.94 28149.61,89094.49 ; 32480.31,88503.94 32480.31,89094.49 ; 32480.31,88818.9 32874.02,88818.9 ; 33385.83,89488.19 33858.27,89488.19 ; 33385.83,90866.14 33858.27,90866.14 ; 33385.83,91850.39 33858.27,91850.39 ; 33385.83,92834.65 33858.27,92834.65 ; 33385.83,97440.94 33858.27,97440.94 ; 33582.68,88503.94 33582.68,94212.6 ; 33582.68,95078.74 33582.68,99803.15 ; 33858.27,89685.04 36417.32,89685.04 ; 33858.27,89881.89 36417.32,89881.89 ; 33858.27,94212.6 33385.83,94212.6 33385.83,88503.94 33858.27,88503.94 ; 33858.27,95078.74 33385.83,95078.74 33385.83,99803.15 33858.27,99803.15 ; 33858.27,99251.97 36614.17,99251.97 36614.17,99803.15 ; 34133.86,89685.04 34133.86,90669.29 ; 34527.56,88503.94 34527.56,90669.29 ; 35433.07,88503.94 35433.07,90669.29 ; 36023.62,88503.94 36023.62,90669.29 ; 36417.32,88503.94 36417.32,90669.29 41141.73,90669.29 ; 36417.32,89094.49 39173.23,89094.49 41141.73,89094.49 ; 36417.32,90078.74 41141.73,90078.74 ; 39173.23,88503.94 39173.23,90078.74 ; 39173.23,89291.34 41141.73,89291.34 ; 39173.23,89881.89 39763.78,89881.89 41141.73,89881.89 ; 39763.78,89291.34 39763.78,90078.74 ; 39983.07,89094.49 39983.07,89291.34 ; 40433.07,89291.34 40433.07,90078.74 ; 41141.73,90984.25 41141.73,90669.29 ; 787.4,88503.94 16338.58,88503.94 16338.58,99803.15 787.4,99803.15 ; 787.4,88503.94 787.4,99803.15 ; 17322.83,88503.94 32874.02,88503.94 32874.02,99803.15 17322.83,99803.15 17322.83,88503.94 ; 33858.27,88503.94 33858.27,90669.29 41141.73,90669.29 ; 33858.27,88503.94 41141.73,88503.94 41141.73,99803.15 33858.27,99803.15 ; 33858.27,88503.94 33858.27,99803.15
  text "CФ МЭИ ПЭ2-18 3 11.03.04" at 3236.16,99610.57 h302.38 r180
  text "CФ МЭИ ПЭ2-18 3 11.03.04" at 19771.59,99610.57 h302.38 r180
  text "CФ МЭИ ПЭ2-18 3 11.03.04 СБ" at 36457.31,99610.57 h302.38 r180
  text "Rz 160" at 14043.31,99082.68 h423.33
  text "(" at 15275.59,99082.68 h423.33
  text ")" at 15708.66,99082.68 h423.33
  text "Перв. примен." at 471.48,98203.68 h211.67 r90
  text "Перв. примен." at 33542.35,98203.68 h211.67 r90
  text "Справ. №" at 471.48,95975.59 h211.67 r90
  text "Справ. №" at 33542.35,95975.59 h211.67 r90
  text "Подп. и дата" at 471.48,93148.07 h211.67 r90
  text "Подп. и дата" at 17006.92,93148.07 h211.67 r90
  text "Подп. и дата" at 33542.35,93148.07 h211.67 r90
  text "Инв. № дубл." at 471.48,91986.51 h211.67 r90
  text "Инв. № дубл." at 17006.92,91986.51 h211.67 r90
  text "Инв. № дубл." at 33542.35,91986.51 h211.67 r90
  text "Взам. инв. №" at 471.48,91003.8 h211.67 r90
  text "Взам. инв. №" at 17006.92,91003.8 h211.67 r90
  text "Взам. инв. №" at 33542.35,91003.8 h211.67 r90
  text "1 *  Размер для справок. /   2 ** Размер обеспеч. инстр. /   3 Класс точности 3 по ГОСТ Р 53429-2009. /   4 Печатная плата должна соответствовать ГОСТ Р 53429-2009, группе жесткости 3 при верхнем значении температуры окружающей среды (85±2) °С. /   5 Шаг координатной сетки 1,25 мм. Линии сетки нанесены через одну. /   6 Конфигурацию печатных проводников выдерживать по координатной сетке с отклонениями от чертежа ±1,5 мм. /   7 Места, обведенные штрихпунктирной линией, печатными проводниками и контактными площадками не занимать. /   8 Ширина печатных проводников не менее (0,25±0,05) мм. /   9 Расстояние между печатными проводниками и контактными площадками не менее 0,2 мм. /   10 Форма контактной площадки произвольная. Допускается занижение контактных площадок до 0,05 мм от края отверстия. /   11 Предельные отклонения расстояний между центрами отверстий ±0,2 мм, кроме оговоренных особо. /   12 Допускается полное или частичное заполнение припоем переходных отверстий, их диаметры контролю не подлежат. /   13 Покрытие проводящего рисунка платы Хим. Мм. /   14 Покрытие печатной платы защитной паяльной маской TAIYO PSR-4000 H855/CA-40 H855 фирма «TAIYO INK»  с двух сторон, кроме контактных площадок. Допускается отсутствие покрытия вокруг контактных площадок, включая проводники и полигоны, на размере не более 0,5 мм от края контактной площадки. Допускается отсутствие покрытия по контуру платы и вокруг неметаллизированных отверстий на размере не более 1,1 мм. /   15 Маркировать защитной маской PMR-6000 W30/CA-40 G30, цвет белый, фирма «TAIYO INK». Попадание маркировочной краски на паяемые поверхности не допускается. Допускаются разрывы в маркировочных знаках, не искажающие восприятие информации. /   16 Покрытие контактных площадок и металлизированных отверстий Хим. Мм Гор. ПОС-63, ГОСТ 21930-76." at 9251.97,90984.25 h302.38
  text "1 Установку элементов производить по чертежу. /   2* Размеры для справок. /   3** Размеры обеспеч. инстр. /   4 Меры защиты от статического электричества по ОСТ 92-1615-74. Степень жесткости II по ОСТ11.073.062-2001. /   5 Элементы поверхностного монтажа паять припойной пастой ПОС-61 ЛОК ТУ 400 К''Р''-1805-22-91, флюс ФПС-3 ТУ400 СП \"ЭВ\"-2178-137-98.  /   6 Покрытие лак УР-231 ТУ6-21-14-90(3). Допускается покрытие лаком ЭП-730 ГОСТ 20824-81(3). /   7 Маркировать обозначение и заводской номер печатного узла черной краской МКЭ ОСТ 4ГО.054.2050М2 шрифтом 3,5 или 5 тип А ГОСТ 2.304-81, вместе, удобном для чтения. /   8 Клеймить." at 34055.12,90984.25 h302.38
  text "CФ МЭИ ПЭ2-18 3 11.03.04" at 12905.57,90291 h302.38
  text "CФ МЭИ ПЭ2-18 3 11.03.04 СБ" at 37558.43,90291 h302.38
  text "Лит." at 14540.49,89922.22 h211.67
  text "Масса" at 15122.37,89922.22 h211.67
  text "Масштаб" at 15713.88,89922.22 h211.67
  text "Лит." at 39343.64,89922.22 h211.67
  text "Масса" at 39925.52,89922.22 h211.67
  text "Масштаб" at 40517.03,89922.22 h211.67
  text "Подп. и дата" at 471.48,89860.67 h211.67 r90
  text "Подп. и дата" at 17006.92,89860.67 h211.67 r90
  text "Подп. и дата" at 33542.35,89860.67 h211.67 r90
  text "Изм." at 9082.15,89725.37 h211.67
  text "Лист" at 9371.04,89725.37 h211.67
  text "№ докум." at 9931.92,89725.37 h211.67
  text "Подп." at 10784.25,89725.37 h211.67
  text "Дата" at 11258.38,89725.37 h211.67
  text "Изм." at 33885.3,89725.37 h211.67
  text "Лист" at 34174.19,89725.37 h211.67
  text "№ докум." at 34735.07,89725.37 h211.67
  text "Подп." at 35587.4,89725.37 h211.67
  text "Дата" at 36061.53,89725.37 h211.67
  text "Разраб." at 9076.1,89518.54 h211.67
  text "Гончаренко В.Ю." at 9751.18,89518.54 h202.27
  text "Разраб." at 33879.25,89518.54 h211.67
  text "Гончаренко В.Ю." at 34554.33,89518.54 h202.27
  text "У" at 39415.45,89517.84 h211.67
  text "Усилитель звука на дискретных элементах" at 36437.11,89506.3 h220.86
  text "У" at 14616.45,89504.84 h211.67
  text "2,5:1" at 15797.55,89503.6 h302.38
  text "2,5:1" at 40600.7,89503.6 h302.38
  text "Плата печатная" at 12296.41,89483.91 h302.38
  text "Пров." at 9076.1,89321.69 h211.67
  text "Смолин В.С." at 9751.18,89321.69 h211.67
  text "Пров." at 33879.25,89321.69 h211.67
  text "Смолин В.С." at 34554.33,89321.69 h211.67
  text "Сборочный чертёж" at 37247.78,89193.87 h211.67
  text "Т.контр." at 9076.1,89124.84 h211.67
  text "Рассказа Д.С." at 9751.18,89124.84 h211.67
  text "Лист" at 14426.85,89124.84 h211.67
  text "1" at 14937.93,89124.84 h211.67
  text "Листов" at 15255.31,89124.84 h211.67
  text "2" at 16018.7,89124.84 h211.67
  text "Т.контр." at 33879.25,89124.84 h211.67
  text "Рассказа Д.С." at 34554.33,89124.84 h211.67
  text "Лист" at 39230,89124.84 h211.67
  text "Листов" at 40058.46,89124.84 h211.67
  text "1" at 40843.45,89124.84 h211.67
  text "1" at 39656.45,89118.84 h211.67
  text "Нач. отд." at 9076.1,88927.99 h211.67
  text "Нач. отд." at 33879.25,88927.99 h211.67
  text "Лист" at 32520.64,88877.95 h211.67
  text "FR-4" at 12854.7,88859.22 h211.67
  text "17 Маркировать месяц и год изготовления черной краской МКЭ ОСТ4 ГО.054.205 ОМ2 по инструкции И-75-89 шрифтом 3,5 или 5 тип А ГОСТ 2.304-81." at 984.25,88779.53 h302.38
  text "Филиал НИУ \"МЭИ\" в г.Смоленск ПЭ2-18" at 14390.13,88750.76 h176.54
  text "Филиал НИУ \"МЭИ\" в г.Смоленск ПЭ2-18" at 39193.28,88750.76 h176.54
  text "Н.контр." at 9076.1,88731.14 h211.67
  text "Н.контр." at 33879.25,88731.14 h211.67
  text "CФ МЭИ ПЭ2-18 3 11.03.04" at 29244.16,88716.2 h302.38
  text "Инв. № подл." at 471.48,88640.05 h211.67 r90
  text "Инв. № подл." at 17006.92,88640.05 h211.67 r90
  text "Инв. № подл." at 33542.35,88640.05 h211.67 r90
  text "2" at 32632.88,88582.68 h211.67
  text "Изм." at 25617.58,88543.31 h211.67
  text "Лист" at 25906.47,88543.31 h211.67
  text "№ докум." at 26449.63,88543.31 h211.67
  text "Подп." at 27319.68,88543.31 h211.67
  text "Дата" at 27793.81,88543.31 h211.67
  text "Утв." at 9076.1,88534.29 h211.67
  text "Утв." at 33879.25,88534.29 h211.67
  text "Копировал" at 12028.86,88337.44 h211.67
  text "Формат А3" at 15221.46,88337.44 h211.67
  text "Копировал" at 28564.29,88337.44 h211.67
  text "Формат А3" at 31756.9,88337.44 h211.67
  text "Копировал" at 36832.01,88337.44 h211.67
  text "Формат А4" at 40029.39,88337.44 h211.67

## Text inside footprints (layer, text, board x,y; h text height)
U1: Top Overlay "*" at 5725,4324.5 h50 r270
ZBOAS134091851: Mechanical 12 "1,5" at 4907.85,90704.99 h302.38; Mechanical 12 "Да" at 6253.78,90704.99 h302.38; Mechanical 12 "0,76" at 3407.46,90704.99 h302.38; Mechanical 12 "4" at 7408.77,90704.99 h302.38; Mechanical 12 "1,3" at 4915.2,91019.95 h302.38; Mechanical 12 "переходное" at 1747.36,91019.95 h302.38; Mechanical 12 "Да" at 6253.78,91019.95 h302.38; Mechanical 12 "0,71" at 3413.45,91019.95 h302.38; Mechanical 12 "10" at 7369.2,91019.95 h302.38; Mechanical 12 "отв." at 7287.03,91325.07 h302.38; Mechanical 12 "Кол." at 7295.21,91620.35 h302.38; Mechanical 12 "металлизации" at 5764.5,91325.07 h302.38; Mechanical 12 "Наличие" at 6026.04,91620.35 h302.38; Mechanical 12 "площадки, мм" at 4439.35,91325.07 h302.38; Mechanical 12 "Диаметр конт." at 4391.18,91620.35 h302.38; Mechanical 12 "мм" at 3470.22,91325.07 h302.38; Mechanical 12 "Диаметр отв.," at 2999.42,91620.35 h302.38; Mechanical 12 "отв." at 1924.2,91325.07 h302.38; Mechanical 12 "Обозначение" at 1564.02,91620.35 h302.38; Mechanical 12 "Таблица 1" at 1340,91910.06 h302.38
ZBOAS277093314: Board "20" at 5113.4,92951.8 h302.38; Board "16" at 4664.51,92951.8 h302.38; Board "12" at 4165.25,92951.8 h302.38; Board "8" at 3697.68,92951.8 h302.38; Board "4" at 3220.04,92951.8 h302.38; Board "0" at 2710.39,92951.8 h302.38; Board "32" at 2390.87,97167.99 h302.38; Board "28" at 2384.15,96675.87 h302.38; Board "24" at 2409.76,96183.74 h302.38; Board "20" at 2378.06,95691.61 h302.38; Board "16" at 2464.54,95199.49 h302.38; Board "12" at 2450.27,94707.36 h302.38; Board "8" at 2499.38,94215.24 h302.38; Board "4" at 2528.35,93723.11 h302.38; Board "0" at 2493.3,93230.98 h302.38
ZBOAS1856698006: Board "Б(1)" at 19696.79,98439.07 h604.8; Board "20" at 20909.4,98177.65 h302.38; Board "16" at 20460.51,98177.65 h302.38; Board "12" at 19961.25,98177.65 h302.38; Board "8" at 19493.68,98177.65 h302.38; Board "4" at 19016.04,98177.65 h302.38; Board "0" at 18506.39,98177.65 h302.38; Board "32" at 18186.87,93985.98 h302.38; Board "28" at 18180.15,94478.1 h302.38; Board "24" at 18205.76,94970.23 h302.38; Board "20" at 18174.06,95462.35 h302.38; Board "16" at 18260.54,95954.48 h302.38; Board "12" at 18246.27,96446.61 h302.38; Board "8" at 18295.38,96938.73 h302.38; Board "4" at 18324.35,97430.86 h302.38; Board "0" at 18289.3,97922.98 h302.38
ZBOAS1947293023: Mechanical 12 "А(2)" at 20416.01,91157.05 h604.8; Mechanical 12 "Б(2)" at 17985.41,91157.05 h604.8
ZBOAS2192091068: Mechanical 12 "Б(2)" at 23561.54,91539.57 h604.8; Mechanical 12 "А(2)" at 23561.54,90241.23 h604.8
ZBOAS2377994059: Board "А(1)" at 24897.61,98685.4 h604.8; Mechanical 12 "Out" at 26216.56,97091.52 h150; Mechanical 12 "R8" at 25729.04,95454.02 h150; Mechanical 12 "In" at 23991.54,97154.02 h150; Mechanical 12 "VT1" at 24609,97544 h150; Mechanical 12 "R9" at 24754.04,96741.52 h150; Mechanical 12 "R1" at 24891.53,96054.02 h150; Mechanical 12 "C2" at 24016.54,96879.02 h150; Mechanical 12 "Vcc" at 25029.06,97879.02 h150; Mechanical 12 "C1" at 25402.46,97054.02 h150; Mechanical 12 "R12" at 25091.56,95441.52 h150; Mechanical 12 "R2" at 25801.5,97331.5 h150; Mechanical 12 "R4" at 25814,96669 h150; Mechanical 12 "VT3" at 26001.5,95668.39 h150; Mechanical 12 "VT2" at 26054.06,95041.52 h150; Mechanical 12 "R7" at 25404.04,97329.02 h150; Mechanical 12 "U1" at 25096.5,96851.5 h150; Mechanical 12 "*" at 25579,96702.75 h125 r270; Mechanical 12 "R10" at 25027.75,95170.25 h150; Mechanical 12 "R11" at 25104.05,94404.02 h150; Mechanical 12 "C3" at 23854.04,95379.02 h150
ZBOAS3586894775: Board "C1" at 37088.1,97027.77 h157.48; Board "C3" at 36246.96,95353.77 h157.48; Board "C2" at 36242.53,96399.77 h157.48; Board "In" at 36130.66,97075.41 h157.48; Board "Out" at 37873.55,96819.42 h157.48; Board "R1" at 36774.01,96126.51 h157.48; Board "R2" at 37477.17,97147.77 h157.48; Board "R4" at 37495.15,96617.77 h157.48; Board "R7" at 36994.61,97317.77 h157.48; Board "R8" at 37268.49,95637.77 h157.48; Board "R9" at 36756.96,96667.77 h157.48; Board "R10" at 36908.38,95487.77 h157.48; Board "R11" at 37335.48,95077.77 h157.48; Board "R12" at 37248.65,95326.51 h157.48; Board "Vcc" at 36954.16,97665.41 h157.48; Board "VT1" at 36594,97307.93 h157.48; Board "VT2" at 37717.02,95337.77 h157.48; Board "VT3" at 37701.76,95803.28 h157.48; Board "U1" at 37106.9,96607.77 h157.48